# Altium PCB PCB1.PcbDoc
Units mil, origin at the board's own origin, x right, y up, seen from the top; angles counter-clockwise.
Board outline 2000.53 x 2000.53 mil, 2 copper layers (Top Layer, Bottom Layer); 55 components, 53 nets, 232 pads, 74 vias.
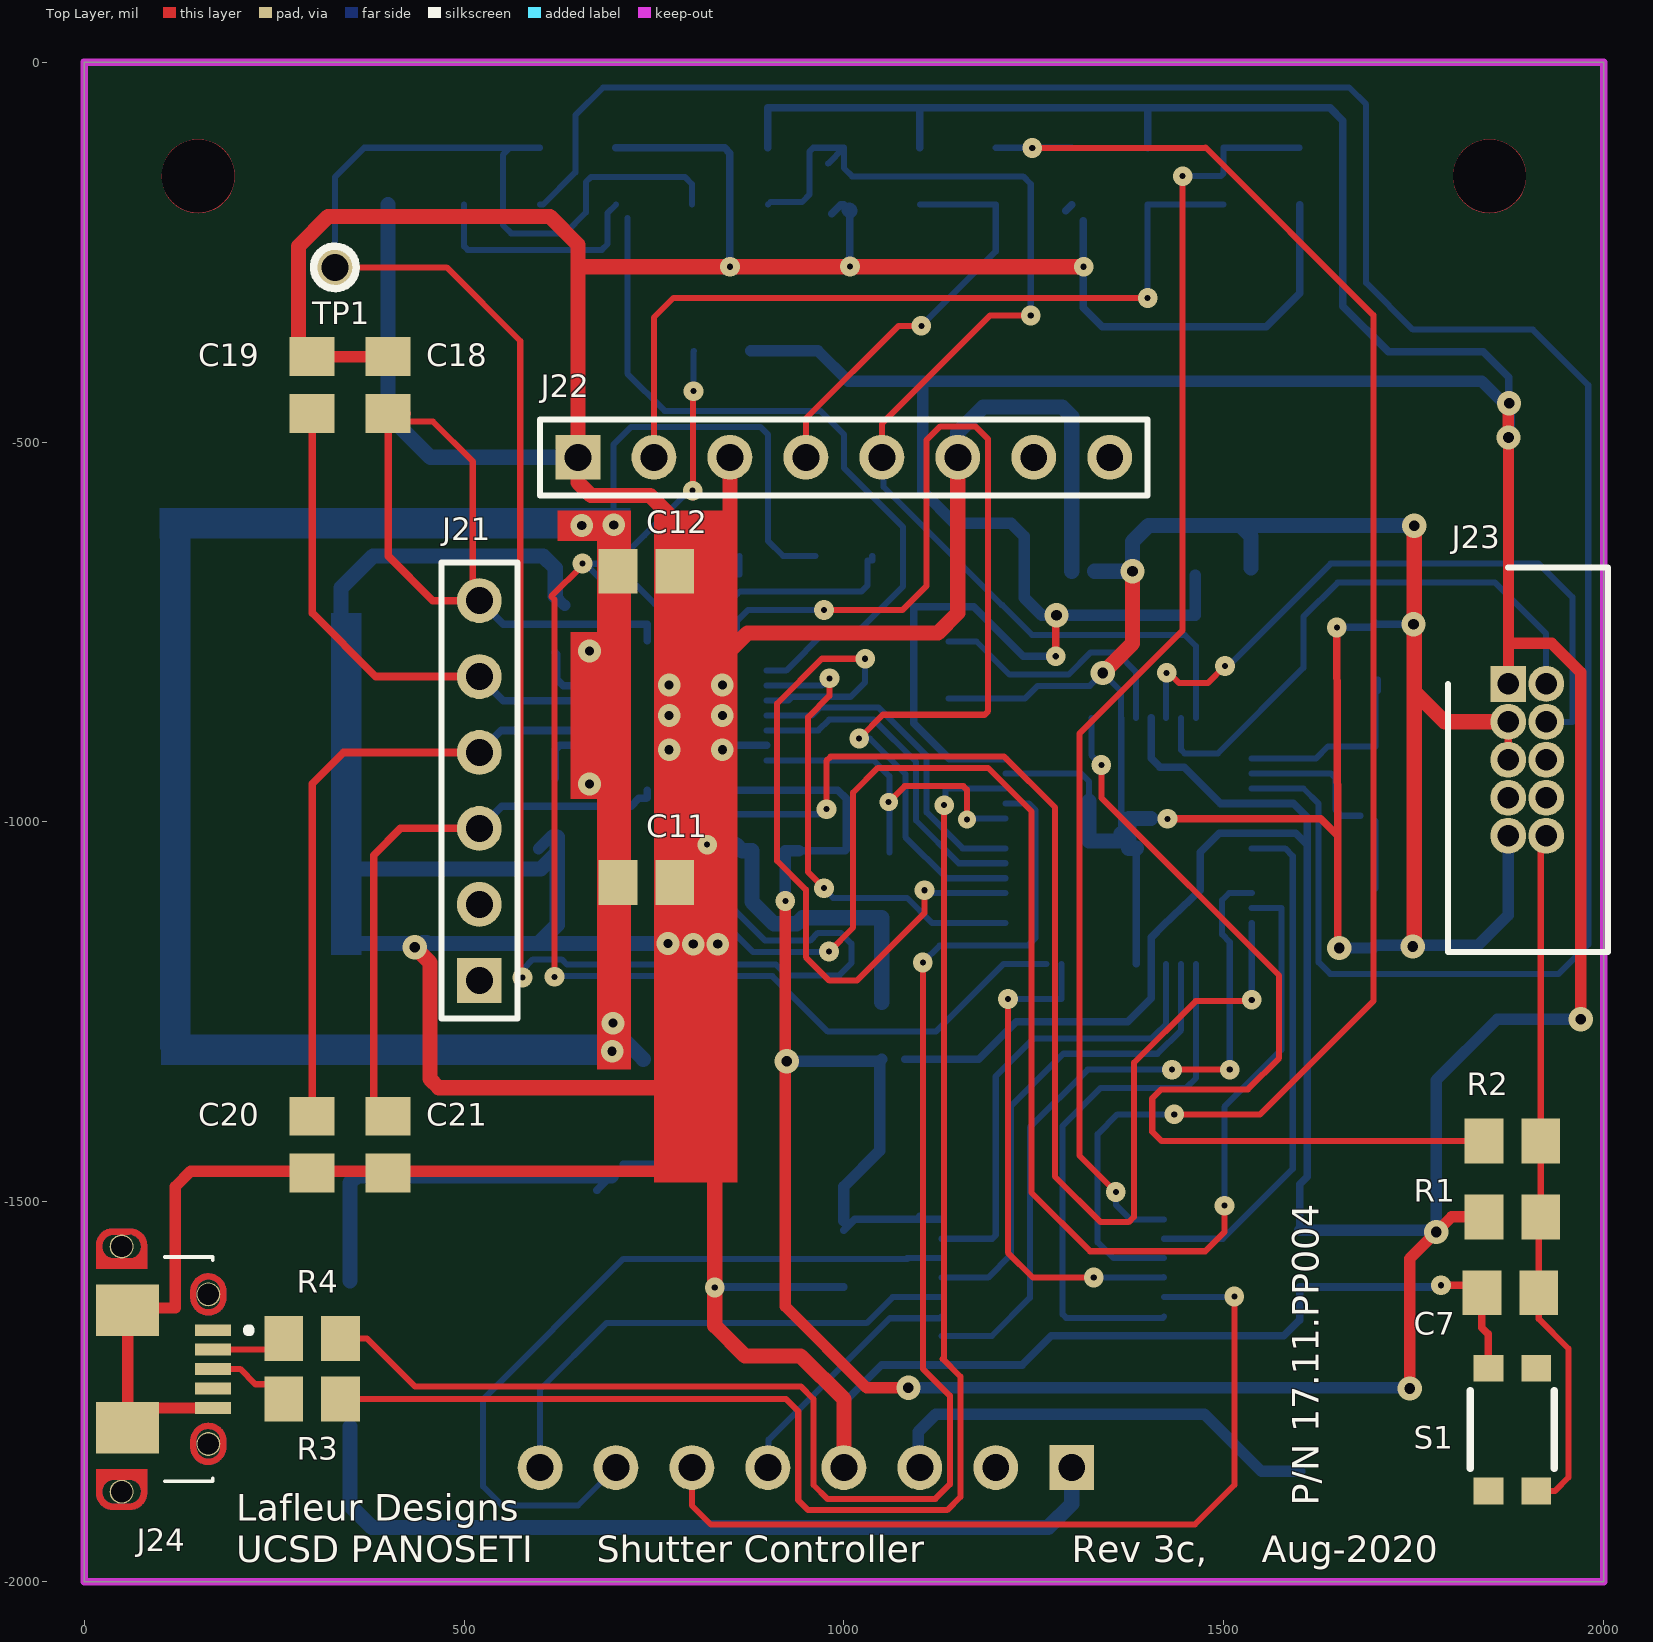
[diagram p0: Top Layer view]
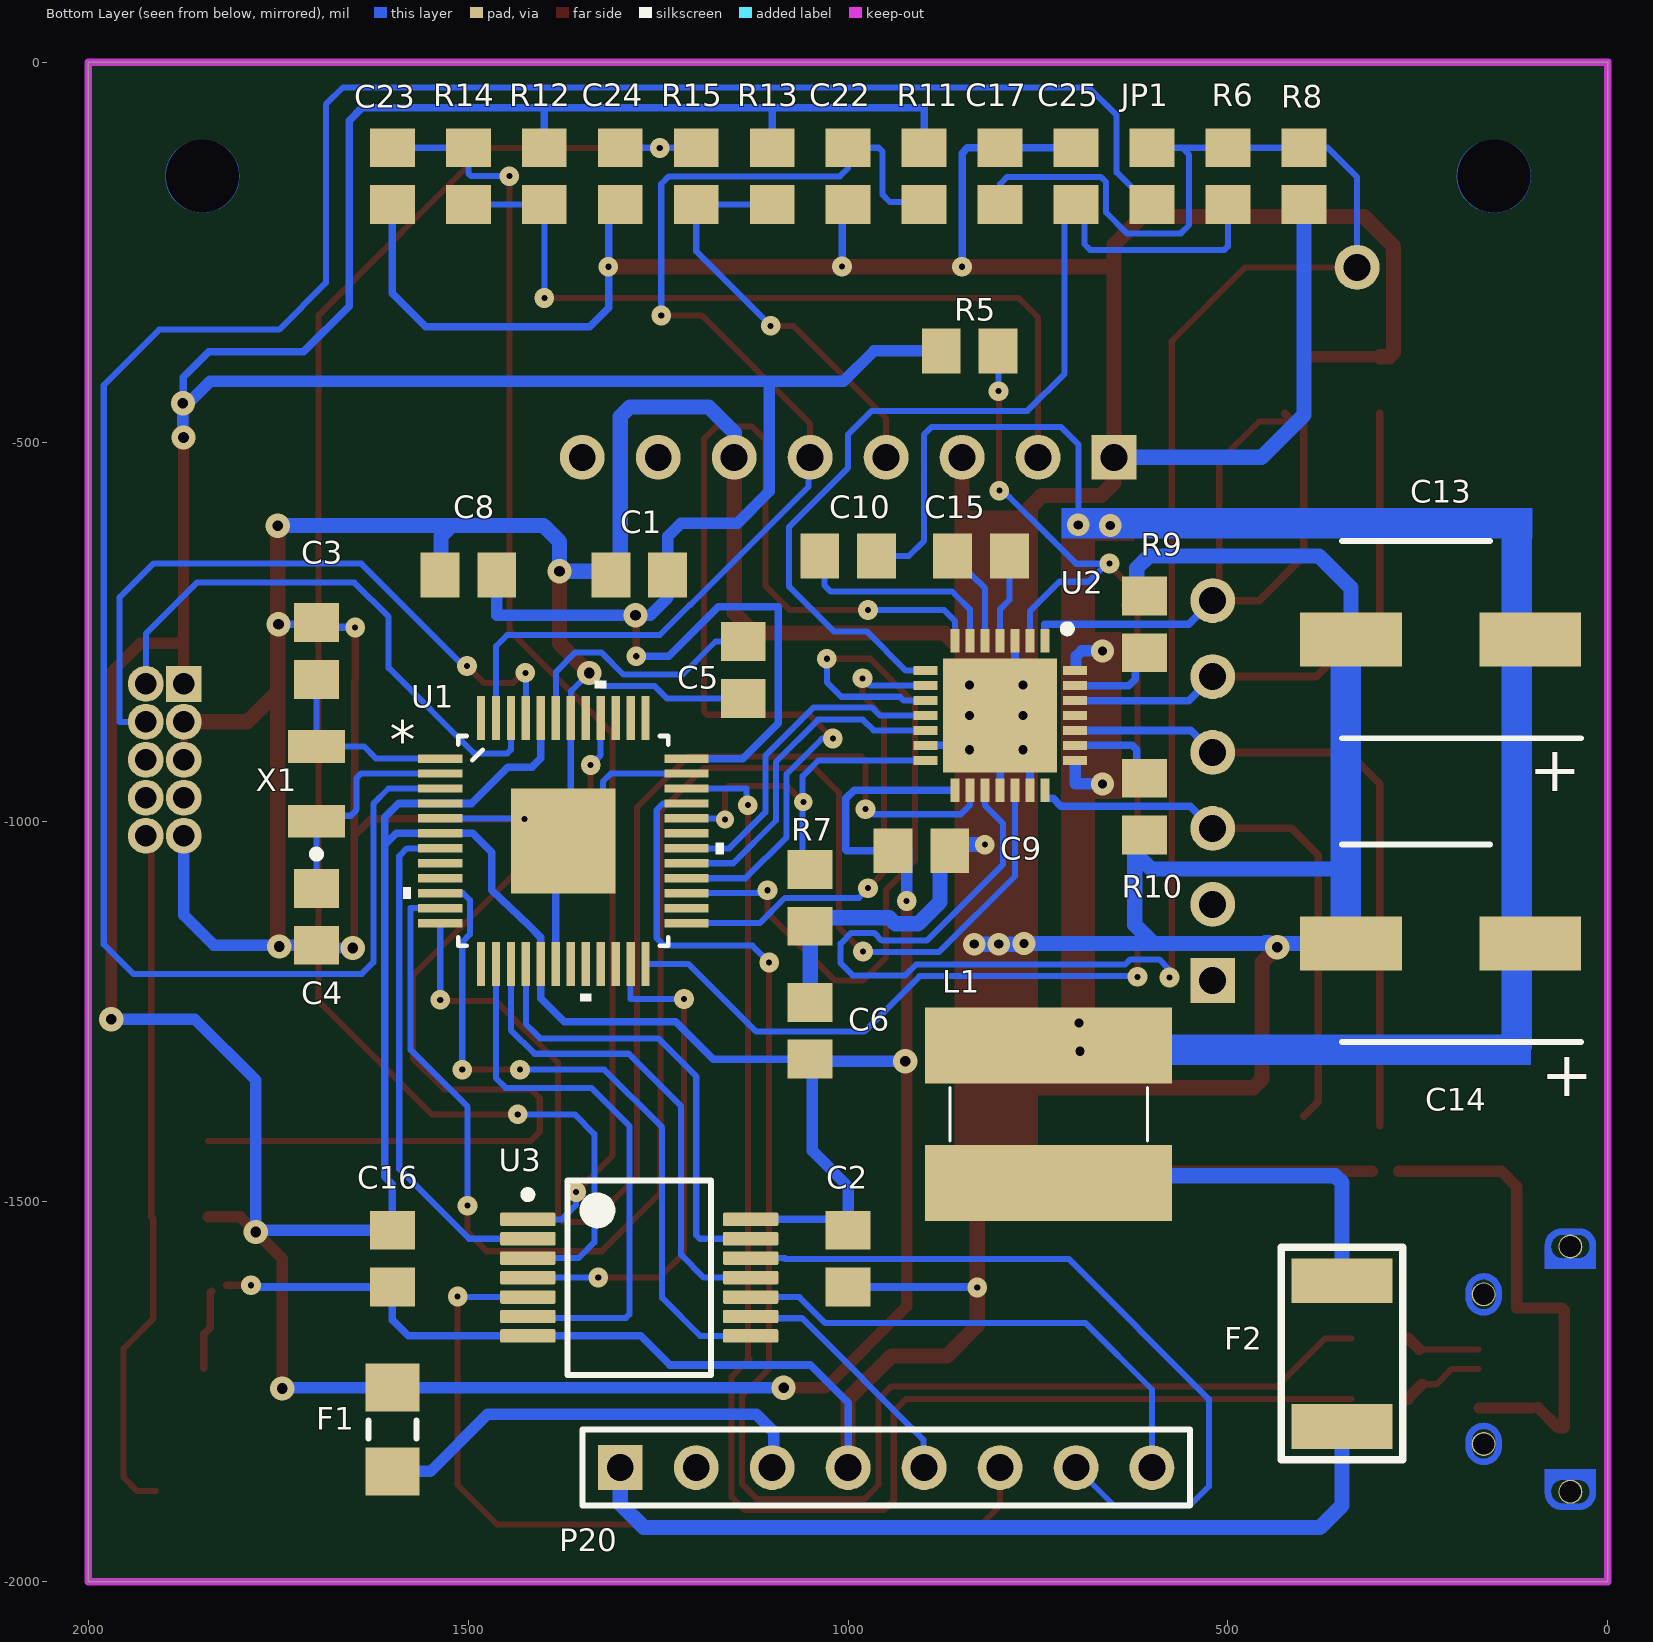
[diagram p1: Bottom Layer view, seen from below]

## Layer stack, top to bottom
Top Solder: solder mask 0.4, Solder Resist, Dk 3.5
Top Layer: signal copper 1.4
Dielectric 1: dielectric 12.6, FR-4, Dk 4.8
Bottom Layer: signal copper 1.4
Bottom Solder: solder mask 0.4, Solder Resist, Dk 3.5

## Board outline
-0.26,-2000 ccw(c0,-2000) 0,-2000.27 2000,-2000.27 ccw(c2000,-2000) 2000.26,-2000 2000.26,0 ccw(c2000,0) 2000,0.27 0,0.27 ccw(c0,0) -0.26,0

## Design rules (kind name [scope] priority, off if disabled: settings)
Clearance [All] p1: gap=6 ignorepadtopadclearanceinfootprint=TRUE except(0: Arc-Hole Track-Hole SMDPad-Hole THPad-Hole Via-Hole Fill-Hole Poly-Hole Region-Hole Text-Hole)
ComponentClearance [All] p1: gap=2 collisioncheckmode=3 verticalgap=2 showdistances=TRUE
HoleSize [All] p1: absolutevalues=TRUE maxlimit=100 minlimit=6 maxpercent=80.000 minpercent=20.000
HoleToHoleClearance [All] p1: gap=6 allowstackedmicrovias=TRUE
MinimumAnnularRing [All] p1: minimumring=6
MinimumSolderMaskSliver [All] p1: minsoldermaskwidth=6
PolygonConnect [All] p1: connectstyle=Relief reliefconductorwidth=10 reliefentries=4 polygonreliefangle="90 Angle" airgapwidth=10
RoutingPriority RoutingPriority_2 [All] p1: routingpriority=3
RoutingPriority RoutingPriority_1 [InNet('GND')] p2: routingpriority=3
RoutingPriority [InNet('+3.3V')] p3: routingpriority=2
RoutingVias [All] p1: holewidth=10 width=22 viastyle="Through Hole" minholewidth=10 minwidth=22 maxholewidth=28 maxwidth=50
SilkToSilkClearance [All] p1: silktosilkclearance=2
SilkToSolderMaskClearance [IsPad] p1: minsilkscreentomaskgap=6 clearancetoexposedcopper=TRUE
SolderMaskExpansion [All] p1: expansion=4
Width GND [InNet('GND')] p1: maxlimit=100 minlimit=6 preferedwidth=20
Width +3.3v [InNet('+3.3V')] p2: maxlimit=20 minlimit=8 preferedwidth=15
Width C10-2(24V) [InNet('NetC10_2')] p3: maxlimit=100 minlimit=8 preferedwidth=20
Width Routing [All] p4: maxlimit=30 minlimit=8 preferedwidth=8
23 further rules are at their usual default settings.

## Classes and differential pairs
component class Sheet2: C9 C10 C11 C12 C13 C14 C15 C16 C17 C18 C19 C20 C21 C22 C23 C24 C25 F2 J21 J22 JP1 L1 P20 R5 R6 R7 R8 R9 R10 R11 R12 R13 R14 R15 TP1 U2 U3
component class Sheet1: C1 C2 C3 C4 C5 C6 C7 C8 F1 J23 J24 R1 R2 R3 R4 S1 U1 X1

## Components (designator, comment, footprint, x,y, rotation, side; value= is the part's Value field where it differs from the comment)
C1 "10uf" 6-0805 1275,-675 r0 bottom
C2 ".1uf" 6-0805 1000,-1575 r270 bottom
C3 "12PF" 6-0805 1700,-775 r90 bottom locked
C4 "12PF" 6-0805 1700,-1125 r270 bottom locked
C5 "1uf" 6-0805 1138,-800 r270 bottom
C6 ".1uf" 6-0805 1050,-1275 r90 bottom
C7 "1uf" 6-0805 1877.4,-1620 r180 top
C8 ".1uf" 6-0805 1500,-675 r0 bottom
C9 ".1uf" 6-0805 903.6,-1038 r180 bottom
C10 ".1uf" 6-0805 1000,-650 r180 bottom
C11 ".1uf" 6-0805 740,-1080 r0 top
C12 ".1uf" 6-0805 740,-670 r0 top locked
C13 "100uf/35v" CAPAE660X610N 220,-760 r0 bottom locked
C14 "100uf/35v" CAPAE660X610N 220,-1160 r0 bottom locked
C15 ".022uf" 6-0805 825,-650 r0 bottom
C16 ".1uf" 6-0805 1600,-1575 r90 bottom
C17 "1uf" 6-0805 800,-150 r90 bottom
C18 "470pf" 6-0805 400,-425 r90 top
C19 "470pf" 6-0805 300,-425 r90 top
C20 "470pf" 6-0805 300,-1425 r270 top
C21 "470pf" 6-0805 400,-1425 r270 top
C22 ".1uf" 6-0805 1000,-150 r90 bottom
C23 ".1uf" 6-0805 1600,-150 r90 bottom
C24 ".1uf" 6-0805 1300,-150 r90 bottom
C25 "4.7uf" 6-0805 700,-150 r90 bottom
F1 "Poly Fuse 250ma" 8-1206 1600,-1800 r270 bottom
F2 "Poly Fuse 750ma" "PTC 2016L" 350,-1700 r90 bottom locked
J21 "Molex 705530110" HDR1X6 520.08,-1208.66 r90 top locked
J22 "Molex 705530112" HDR1X8 650,-520.08 r0 top locked
J23 "3220-10-0100-00" SHDR10W41P127_2X5_1265X510X565P 1874.61,-818.31 r270 top locked
J24 "DX4R205JJAR1800" *JAE_DX4R205JJAR1800_DX4R205JJAR1800(Primary) 0,-1720.47 r270 top locked
JP1 "NU" 6-0805 600,-150 r270 bottom
L1 "MSS7341S" MSS7341502NLD 736,-1385 r0 bottom locked value=Value
P20 "Molex 9014-71108" HDR1X8 1300,-1850 r180 bottom locked
R1 "10k" 6-0805 1880,-1520 r0 top
R2 "330" 6-0805 1880,-1420 r0 top
R3 "22" 6-0805 300,-1760 r0 top
R4 "22" 6-0805 300,-1680 r0 top
R5 "10k" 6-0805 840,-380 r180 bottom
R6 "10k 1%" 6-0805 500,-150 r90 bottom
R7 "NU" 6-0805 1050,-1100 r270 bottom
R8 "10k 1%" 6-0805 400,-150 r270 bottom
R9 "0.56r 0805" 6-0805 610,-740 r90 bottom locked
R10 "0.56r 0805" 6-0805 610,-980 r270 bottom locked
R11 "10k" 6-0805 900,-150 r270 bottom
R12 "10k" 6-0805 1400,-150 r270 bottom
R13 "10k" 6-0805 1100,-150 r270 bottom
R14 "10k" 6-0805 1500,-150 r90 bottom
R15 "10k" 6-0805 1200,-150 r90 bottom
S1 "Reset" KMR_2 1880,-1800 r90 top
TP1 "TestPoint" "Test Point-Thru-Hole" 330,-270 r0 top
U1 "ATSAMD21G18A-AU" TQFP48_7x7MC 1375,-1025 r180 bottom locked value=Value
U2 "Part Number: TMC2209-LA-T" QFN50P500X500X90-29N 800,-860 r270 bottom locked value=Value
U3 "SN74LVC14ADBR" DB0014A_M 1275,-1600 r180 bottom locked
X1 "ABS07-32.768KHz-T" ABRA-ABS07-2_V 1700,-950 r90 bottom locked

## Footprints (in the part's own frame and the unit in brackets; to place one, negate y for a bottom-side part, rotate by r counter-clockwise, add the part's x,y. Pads: shape width x height; smd on the part's side, far side on the other; paste and mask are expansions set on the pad)
6-0805 [mm]
  rect 1.3x1.5 smd: 1(-0.95,0) 2(0.95,0)
8-1206 [mm] "Chip Resistor; Body 3.1 x 1.6 mm (LxW typ)"
  rect 1.6x1.8 smd: 1(-1.4,0) 2(1.4,0)
  silkscreen extent -0.3,-0.8 0.3,0.8
*JAE_DX4R205JJAR1800_DX4R205JJAR1800(Primary) [mm]
  rect 0.4x1.2 smd: 1(-1.3,4.3) 2(-0.65,4.3) 3(0,4.3) 4(0.65,4.3) 5(1.3,4.3)
  round 0.8 hole 0.711 unplated: None(-4.1,1.25) None(-2.5,4.15) None(2.5,4.15) None(4.1,1.25)
  rect 1.725x2.1 smd: S4(-1.962,1.45) S5(1.962,1.45)
  Top Layer region: 197 vertices and 0 holes, not listed, extent 3.35,0.4 4.7,2.1
  Top Layer region: 200 vertices and 0 holes, not listed, extent -4.7,0.4 -3.35,2.1
  Top Layer region: 260 vertices and 0 holes, not listed, extent -3.2,3.55 -1.8,4.75
  Top Layer region: 263 vertices and 0 holes, not listed, extent 1.8,3.55 3.2,4.75
  Bottom Layer region: 197 vertices and 0 holes, not listed, extent 3.35,0.4 4.7,2.1
  Bottom Layer region: 197 vertices and 0 holes, not listed, extent -4.7,0.4 -3.35,2.1
  Bottom Layer region: 263 vertices and 0 holes, not listed, extent 1.8,3.55 3.2,4.75
  Bottom Layer region: 260 vertices and 0 holes, not listed, extent -3.2,3.55 -1.8,4.75
  silkscreen extent -3.75,2.7 3.75,5.6
ABRA-ABS07-2_V [mm] "Hand Drawn, 2-Leads, Body 3.2x1.5mm, Pitch 2.5mm"
  rect 1.1x1.9 smd: 1(-1.25,0) 2(1.25,0)
  silkscreen extent -2.47,-0.12 -2.23,0.13, body extent -1.6,-0.75 1.6,0.75, height 0.9
CAPAE660X610N [mm]
  rect 3.4x1.8 smd: 1(-3,0) 2(3,0)
  silkscreen extent -4.7,-3.3 3.3,3.3, body extent -3.9,-3.4 3.9,3.4, height 6.1
DB0014A_M [mm] "SOP, 14-Leads, Body 5.6x6.5mm, Pitch 0.65mm, IPC Low Density"
  rrect22% 1.85x0.45 smd: 1(-3.725,1.95) 2(-3.725,1.3) 3(-3.725,0.65) 4(-3.725,0) 5(-3.725,-0.65) 6(-3.725,-1.3) 7(-3.725,-1.95) 8(3.725,-1.95) 9(3.725,-1.3) 10(3.725,-0.65) 11(3.725,0) 12(3.725,0.65) 13(3.725,1.3) 14(3.725,1.95)
  silkscreen extent -3.85,-3.25 2.4,3.25, body extent -3.91,-3.1 3.91,3.1, height 2
HDR1X6 [mm] "Connector; Header; 6 Position"
  rect 1.5x1.5 hole 0.9: 1(0,0)
  round 1.5 hole 0.9: 2(2.54,0) 3(5.08,0) 4(7.62,0) 5(10.16,0) 6(12.7,0)
  silkscreen extent -1.27,-1.27 13.97,1.27
HDR1X8 [mm] "Connector; Header; 8 Position"
  rect 1.5x1.5 hole 0.9: 1(0,0)
  round 1.5 hole 0.9: 2(2.54,0) 3(5.08,0) 4(7.62,0) 5(10.16,0) 6(12.7,0) 7(15.24,0) 8(17.78,0)
  silkscreen extent -1.27,-1.27 19.05,1.27
KMR_2 [mm]
  rect 0.9x1 smd: 1(-2.05,-0.8) 2(-2.05,0.8) 3(2.05,-0.8) 4(2.05,0.8)
  silkscreen extent -1.3,-1.4 1.3,1.4
MSS7341502NLD [mil]
  rect 325x100 smd: 1(0,90.55) 2(0,-90.55)
  silkscreen extent -130,-35 130,35
"PTC 2016L" [mil]
  rect 59x133 smd: 1(-96,0) 2(96,0)
  silkscreen extent -140,-80 140,80
QFN50P500X500X90-29N [mm]
  rect 0.8x0.3 smd: 1(-2.5,1.5) 2(-2.5,1) 3(-2.5,0.5) 4(-2.5,0) 5(-2.5,-0.5) 6(-2.5,-1) 7(-2.5,-1.5) 15(2.5,-1.5) 16(2.5,-1) 17(2.5,-0.5) 18(2.5,0) 19(2.5,0.5) 20(2.5,1) 21(2.5,1.5)
  rect 0.3x0.8 smd: 8(-1.5,-2.5) 9(-1,-2.5) 10(-0.5,-2.5) 11(0,-2.5) 12(0.5,-2.5) 13(1,-2.5) 14(1.5,-2.5) 22(1.5,2.5) 23(1,2.5) 24(0.5,2.5) 25(0,2.5) 26(-0.5,2.5) 27(-1,2.5) 28(-1.5,2.5)
  rect 3.8x3.8 smd: 29(0,0)
  silkscreen extent -3.02,2.12 -2.78,2.37, body extent -2.55,-2.55 2.55,2.55, height 0.9
SHDR10W41P127_2X5_1265X510X565P [mm]
  rect 1.2x1.2 hole 0.711: 1(0,0)
  round 1.2 hole 0.711: 2(0,1.27) 3(1.27,0) 4(1.27,1.27) 5(2.54,0) 6(2.54,1.27) 7(3.81,0) 8(3.81,1.27) 9(5.08,0) 10(5.08,1.27)
  silkscreen extent -3.89,-2.01 8.97,3.34
"Test Point-Thru-Hole" [mm]
  round 1.5 hole 0.9: 1(0,0)
  silkscreen extent -0.71,-0.71 0.71,0.71
TQFP48_7x7MC [mil]
  rect 58x11 smd: 1(-162,108.27) 2(-162,88.58) 3(-162,68.9) 4(-162,49.21) 5(-162,29.53) 6(-162,9.84) 7(-162,-9.84) 8(-162,-29.53) 9(-162,-49.21) 10(-162,-68.9) 11(-162,-88.58) 12(-162,-108.27) 25(162,-108.27) 26(162,-88.58) 27(162,-68.9) 28(162,-49.21) 29(162,-29.53) 30(162,-9.84) 31(162,9.84) 32(162,29.53) 33(162,49.21) 34(162,68.9) 35(162,88.58) 36(162,108.27)
  rect 11x58 smd: 13(-108.27,-162) 14(-88.58,-162) 15(-68.9,-162) 16(-49.21,-162) 17(-29.53,-162) 18(-9.84,-162) 19(9.84,-162) 20(29.53,-162) 21(49.21,-162) 22(68.9,-162) 23(88.58,-162) 24(108.27,-162) 37(108.27,162) 38(88.58,162) 39(68.9,162) 40(49.21,162) 41(29.53,162) 42(9.84,162) 43(-9.84,162) 44(-29.53,162) 45(-49.21,162) 46(-68.9,162) 47(-88.58,162) 48(-108.27,162)
  rect 138x138 smd paste-68.5 mask+0: EPAD(0,0)
  silkscreen extent -211,-211 211,211, body extent 0,0 10,10, height 10

## Part data
C1 C2 C3 C4 C5 C6 C7 C8 C9 C10 C11 C12 C15 C16 C17 C18 C19 C20 C21 C22 C23 C24 C25: library part CAP_2, "Capacitor", Fitted=True
C13 C14: library part EEE-FT1V101AP, "Capacitor Polarised", Manufacturer_Name=Panasonic, Mouser Part Number=667-EEE-FT1V101AP, Allied_Number=70258385, Allied Price/Stock=https://www.alliedelec.com/panasonic-eee-ft1v101ap/70258385/, Datasheet Link=https://industrial.panasonic.com/cdbs/www-data/pdf/RDE0000/ABA0000C1240.pdf, Height=6.1mm, Manufacturer_Part_Number=EEE-FT1V101AP, Mouser Price/Stock=https://www.mouser.com/Search/Refine.aspx?Keyword=667-EEE-FT1V101AP
F1 F2: library part "Poly Fuse", "Poly Fuse"
J21: library part "Header 6", "Header, 6-Pin", LatestRevisionDate=17-Jul-2002, LatestRevisionNote="Re-released for DXP Platform.", Publisher="Altium Limited"
J22 P20: library part "Header 8", "Header, 8-Pin", LatestRevisionDate=17-Jul-2002, LatestRevisionNote="Re-released for DXP Platform.", Publisher="Altium Limited"
J23: "Connector", Manufacturer_Name="CNC Tech", Datasheet Link=http://www.cnctech.us/pdfs/3220-XX-0100-00.pdf, Height=5.65mm, Manufacturer_Part_Number=3220-10-0100-00
J24: "DX4 series, receptacle, on-board, right-angle standard mount, surface mount", Package=None, Digi-Key_Part_Number=670-2677-1-ND, Digi-Key_Purchase_URL=https://www.digikey.com/product-detail/en/jae-electronics/DX4R205JJAR1800/670-2677-1-ND/3903237?utm_source=snapeda&utm_medium=aggregator&utm_campaign=symbol, MF="JAE Electronics", MP=DX4R205JJAR1800, SnapEDA_Link=https://www.snapeda.com/parts/DX4R205JJAR1800/JAE%20Electronics/view-part/?ref=snap
JP1 R1 R2 R3 R4 R5 R6 R7 R8 R9 R10 R11 R12 R13 R14 R15: library part ERJ8EN, "Precision Thick Film Chip Resistor, 10 Ohm to 2.2M Ohm Range, 1% Tolerance, 1206 Size, 0.125 W", PackageDocument=Mar-2003, Code_IPC="3216 [1206]", ComponentLink1Description="Manufacturer Link", ComponentLink1URL=http://www.panasonic.com/industrial/components/resistive_products.htm, ComponentLink2Description=Datasheet, ComponentLink2URL=http://www.panasonic.com/industrial/components/pdf/AOA0000CE2.pdf, LatestRevisionDate=19-Mar-2004, LatestRevisionNote="Silkscreen size reduced.", PackageReference=8-1206, Published=17-Dec-2003, Publisher="Altium Limited"
L1: library part SRU1048-101Y, "No Description Available", Built_By=EMA_UL_Team, Copyright="Copyright (C) 2018 Accelerated Designs. All rights reserved", Manufacturer_Part_Number=SRU1048-101Y, Vendor="Bourns Electronics"
S1: library part SW-PB, "Switch", LatestRevisionDate=17-Jul-2002, LatestRevisionNote="Re-released for DXP Platform.", PackageReference=SPST-2, Published=24-Mar-1999, Publisher="Altium Limited"
U1: "No Description Available", Built_By=EMA_Molly, Copyright="Copyright (C) 2018 Accelerated Designs. All rights reserved", Manufacturer_Part_Number=ATSAMD21G18A-AU, RefDes=RefDes, Type=DEV, Vendor=Microchip
U2: library part TMC2209-LA-T, "No Description Available", Copyright="Copyright (C) 2018 Accelerated Designs. All rights reserved", Manufacturer_Part_Number=TMC2209-LA-T, RefDes=RefDes, Type=DEV, Vendor=Trinamic
U3: library part CMP-1615-00327-3, "Hex Schmitt-Trigger Inverter, DB0014A, LARGE T&R", F @ Nom Voltage(Max)(Mhz)=100, Generic Part Number=SN74LVC14A, ICC @ Nom Voltage(Max)(mA)=0.01, Manufacturer="Texas Instruments", Operating Temperature Range(C)="-40 to 125", Rating=Catalog, tpd @ Nom Voltage(Max)(ns)=11,7.8,7.5,6.4, Voltage(Nom)(V)=1.8,2.5,2.7,3.3, Bits(#)=6, Code_JEDEC=MO-150, DatasheetVersion=SCAS285AA, Input Type=CMOS,TTL, Output Drive (IOL/IOH)(Max)(mA)=-24/24, Output Type=CMOS, PackageReference=DB0014A, Schmitt Trigger=Yes, Technology Family=LVC, VCC(Max)(V)=3.6, VCC(Min)(V)=2
X1: library part CMP-0447-00001-2, "Crystal, 32.768 kHz, 12.5 pF, -40 to 85 degC, SMD Low Profile 3.2 x 1.5 x 0.9 mm, Tape and Reel", Equivalent Series Resistance (R1)="70 Kohm", Frequency="32.768 kHz", Frequency Tolerance @+25degC="+/- 20 ppm", Insulation Resistance (Min)="500 Mohm", Load Capacitance (CL)="12.5 pF", Manufacturer=Abracon, Operating Temperature="-40 to 85 degC", Q Value (Type)=30000, Shunt Capacitance (C0)="0.9 to 1.2 pF", ComponentLink1Description="Manufacturer URL", ComponentLink1URL=http://www.abracon.com/, ComponentLink2Description=Datasheet, ComponentLink2URL=http://www.abracon.com/Resonators/ABS07.pdf, ComponentLink3Description="Package Specification", ComponentLink3URL=http://www.abracon.com/Resonators/ABS07.pdf, DatasheetVersion=04.03.13, Drive Level (Type)="0.1 uW", Mounting Technology="Surface Mount", Operation Mode="Flexural Mode (Tuning Fork)", PackageDescription="2-Pin Hand Drawn, Body 3.2x1.5mm, Pitch 2.5mm", PackageReference=ABS07-2, Packing="Tape and Reel", PartNumber=ABS07-32.768KHz-T

## Free pads (board coordinates)
  round 60 hole 96.06 unplated: 5(150,-150) 5(1850,-150)

## Via types
v1: diameter 26, hole 8, Top Layer to Bottom Layer, 42 vias
v2: diameter 30, hole 12, Top Layer to Bottom Layer, 15 vias
v3: diameter 32, hole 14, Top Layer to Bottom Layer, 15 vias
v4: diameter 24, hole 8, Top Layer to Bottom Layer, 2 vias

## Nets (pads, with @x,y where several pads share a name; then routed paths per layer and width w, separated by ;. In a path a pad name is that pad's centre, name@x,y a point inside that pad or via, vN(x,y) a via of type N, cw(c..) or ccw(c..) an arc to the next point about the centre after c; other vN are vias at no path point)
+3.3V: C1.1 C2.1 C6.1 C8.1 C9.1 C16.2 F1.1 J23.1 R1.1 R5.1 R11.1 R12.1 R13.1 U1.4 U1.6 U1.17 U1.36 U1.44 U2.15 U3.14 | length 9414.3
  Top Layer w10: v1(1279,-782) v3@1279,-729
  Top Layer w15: v1(923,-1104.25) 923,-1638 1030,-1745 v3(1085,-1745) ; v3@1279,-729 v3(1280,-728) ; v3(1745,-1746) 1745,-1575 v3(1780,-1540) 1800,-1520 R1.1 ; J23.1 1875,-817.91 v3(1875,-494) 1874.61,-493.61 1874.61,-450.25 v3(1875.75,-449.1) ; 1877,-765 1931.75,-765 1970,-803.25 v3(1970,-1260)
  Bottom Layer w10: U2.15@859.06,-958.25 992,-958.25 1003,-969.25 1003,-1036.5 1001.5,-1038 C9.1 ; R11.1 900,-60 1100,-60 ; C2.1 1014.37,-1523.23 U3.14@1103.86,-1523.23 ; 1080.5,-1312.4 1177.85,-1312.4 1227.25,-1263 1373.78,-1263 1404.53,-1232.25 U1.17 1404.53,-1152.25 1420.53,-1136.25 1469,-1090.25 1469,-1040.25 1494.09,-1015.16 U1.6 1595.16,-1015.16 1610,-1030 ; U3.14@1100,-1519.37 U3.14@1103.86,-1523.23 ; R13.1 1100,-60 ; U3.14 U3.14@1103.86,-1523.23 ; U1.36 1138.73,-916.73 1092,-870 1092,-717 1171,-717 1236,-782 v1(1279,-782) ; R12.1 1400,-61 ; U1.44 1404.53,-916.53 1416.25,-928.25 1448.25,-928.25 1495.79,-975.79 U1.4 1591.79,-975.79 1610,-994 1610,-1030 ; C16.2 1600,-1477.25 1610,-1467.25 1610,-1030 ; v3@1874.61,-450.25 1875.51,-449.35 1875.51,-414.51 1842,-381 1717,-381 1657,-321 1657,-77 1640,-60 1100,-60
  Bottom Layer w15: R5.1 966,-380 1006,-420 1104,-420 ; v1@923,-1100 923,-1038 C9.1 ; v3@935.6,-1315 C6.1@1047.4,-1315 ; C2.1@1000,-1525 1000,-1480 1047,-1433 1047,-1315.4 C6.1@1047.4,-1315 ; C6.1 C6.1@1047.4,-1315 ; v3(1085,-1745) 1090,-1745 1090.12,-1744.88 F1.1 v3@1745,-1744.88 ; v3@1276.5,-731.5 v3(1280,-728) ; C8.1 1462.6,-728 v3(1280,-728) ; C16.2 v3@1780,-1537.6 ; v3(1780,-1540) v3@1780,-1537.6 ; v3@1874.61,-450.25 1870,-450.25 1839.75,-420 1104,-420 ; v3(1875,-494) 1875.75,-493.25 v3(1875.75,-449.1) ; v3(1970,-1260) 1860,-1260 1780,-1340 v3@1780,-1537.6 ; 1104,-420 1104,-565 1145.85,-606.85 1220.2,-606.85 1237.6,-624.25 C1.1 1237.6,-705.05 1260.55,-728 v3(1280,-728)
  other v3: 925,-1315
GND: C1.2 C2.2 C3.2 C4.2 C5.2 C6.2 C7.2 C8.2 C9.2 C11.2 C12.2 C13.2 C14.2 C16.1 C17.2 C18.2 C19.2 C20.2 C21.2 C22.1 C23.1 C24.1 C25.2 J22.1 J22.3 J22.6 J23.3 J23.5 J23.9 J24.5 J24.S4 J24.S5 P20.4 R7.2 R8.2 R9.2 R10.2 S1.4 U1.5 U1.18 U1.35 U1.42 U1.EPAD U2.3 U2.13 U2.18 U2.20 U2.29 U3.7 | length 15056.1
  Top Layer w8: v3@1650,-1164 v3(1652,-1166)
  Top Layer w10: v1(1426,-996) 1628,-996 1650,-1018 ; v1(1649,-744) 1650,-1018 ; v3@1650,-1164 1650,-1018 ; v1(1786,-1610) C7.2@1818.25,-1610 ; C7.2@1838,-1618 C7.2 1840,-1665.75 1848.5,-1674.25 S1.4 ; J23.5 J23.3
  Top Layer w15: J24.S4 57.09,-1796.8 57.8,-1797.51 65.18,-1797.51 J24.S5@91.63,-1771.06 ; J24.S4@57.8,-1642.99 60.78,-1640 120,-1640 120,-1480 140,-1460 C20.2@275,-1460 ; 99.61,-1771.65 J24.5 ; C19.2 C18.2 ; C20.2@310,-1460 750,-1460
  Top Layer w20: C19.2 287.6,-387.6 282,-382 282,-242.25 321,-203.25 613,-203.25 650,-240.25 650,-269.25 ; v3(435,-1165) 455,-1185 455,-1338.28 466.72,-1350 760,-1350 770,-1340 ; 770,-1424.25 770,-1340 ; v2(770,-860) v2(770,-905) 770,-1340 ; v2(770,-820) 770,-595.25 745,-570.25 667,-570.25 650,-553.25 J22.1 650,-269.25 ; v2(840,-860) v2(840,-905) 830,-915 v1(830,-1613.11) 830,-1663.25 869.75,-1703 943,-1703 1000,-1760 P20.4 ; v2(840,-820) 840,-784.25 873,-751.25 1123.75,-751.25 1150,-725 J22.6 ; 850,-600 850,-530 J22.3 ; v1(1315.75,-269.25) v1(850,-269.25) 650,-269.25 ; v3(1341,-804) 1380,-765 v3(1380,-670) ; v3(1749,-1164) 1751,-1162 1751,-828.31 ; v3(1751,-610) 1751,-828.31 ; J23.3 1791,-868.31 1752,-829.31 1751,-828.31
  Bottom Layer w8: v1@830,-1616.21 v1(830,-1613.11) ; C5.2 1238.6,-837.4 1255,-821 1324,-821 v3(1341,-804) 1364.84,-827.84 1364.84,-862.69 U1.42 U1.EPAD@1365.16,-1015.16 ; U1.35 1312.42,-936.42 1322.86,-946.86 U1.EPAD@1322.86,-972.86 ; U1.EPAD@1404.53,-995.47 U1.5 ; C3.2@1693.6,-744 C3.2 C3.2@1702.4,-740
  Bottom Layer w10: C25.2 C17.2 843,-112.6 850,-119.6 v1(850,-269.25) ; U2.20 760.63,-899.37 U2.29 ; U2.3 780.32,-840.31 U2.29 ; U2.18 U2.29 ; v2(840,-905) 845.63,-899.37 U2.13 ; v1@841.39,-1612.4 C2.2 ; C22.1@984,-199.46 996.06,-187.4 C22.1 C22.1@1007,-194.4 ; P20.4 1000,-1765 1050,-1715 1235,-1715 1273.23,-1676.77 U3.7 1579,-1676.77 1600,-1655.77 C16.1 1786,-1612.4 v1(1786,-1610) ; v1(1008,-269) C22.1@1008,-195.4 ; C24.1@1292,-195.4 C24.1 ; C24.1@1315,-209 1315,-323 1340.25,-348.25 1556,-348.25 1600,-304.25 C23.1 ; U1.18 U1.EPAD@1384.84,-1034.84 ; v1(1649,-744) C3.2@1693.6,-744 ; C3.2@1702.4,-740 v3(1750,-740)
  Bottom Layer w15: R10.2@597.97,-1035.49 616.06,-1017.4 620,-1017.4 R10.2@622.6,-1020 ; R9.2@620,-702.6 R9.2@632.4,-715 ; v3(1652,-1166) 1696.4,-1166 C4.2 1835,-1162.4 1874.61,-1122.8 J23.9
  Bottom Layer w20: C14.2 766.74,-1160 v2(768.4,-1160) 769.4,-1161 v2(801.7,-1161) v2(834,-1161) ; C13.2 338.11,-691.89 380,-650 604.14,-650 620,-665.86 R9.2@620,-702.6 ; 350,-1057.25 355,-1062.25 601,-1062.25 R10.2@622.6,-1040.65 ; R8.2 400,-464.25 455.83,-520.08 J22.1 ; 451,-1159 446,-1159 444.75,-1160.25 597.77,-1160.25 598.02,-1160 598.22,-1160 622.6,-1135.62 R10.2@622.6,-1040.65 ; R10.2@622.6,-1020 R10.2@622.6,-1040.65 ; v1(820,-1030) 858.2,-1030 C9.2 879,-1038 879,-1105.25 908,-1134.25 937.7,-1134.25 945.7,-1126.25 1050,-1126.25 R7.2 C6.2 ; C22.1@1007,-194.4 C22.1@1008,-195.4 ; J22.6 1150,-487.55 1183.55,-454 1287.51,-454 1300,-466.49 C1.2@1300,-670 ; U1.EPAD@1322.86,-972.86 1322.86,-1025 U1.EPAD ; C1.2@1330,-670 v3(1380,-670) 1380,-631 1401,-610 1522,-610 ; U1.EPAD@1365.16,-1015.16 U1.EPAD@1375,-1015.16 ; U1.EPAD@1384.84,-1034.84 1375,-1034.84 U1.EPAD ; U1.EPAD@1404.53,-995.47 1375,-995.47 U1.EPAD@1375,-1015.16 ; C8.2@1536,-666 1536,-624 1522,-610 ; v3(1751,-610) 1522,-610 ; U1.EPAD U1.EPAD@1375,-1015.16
NetC3_1: C3.1 U1.1 X1.2 | length 264
  Bottom Layer w8: U1.1 1621.27,-916.73 1637.21,-900.79 X1.2 1700,-827.4 1703,-827.4 1703,-812.4 C3.1
NetC4_1: C4.1 U1.2 X1.1 | length 279
  Bottom Layer w8: U1.2 1617.42,-936.42 1641.42,-936.42 1647,-942 1647,-984 1655,-992 X1.1@1680,-992 ; C4.1 X1.1
NetC5_1: C5.1 U1.43 | length 347.7
  Bottom Layer w8: C5.1 1174.6,-762.6 1218,-806 1296,-806 1325,-777 1359,-777 1384.84,-802.84 U1.43
NetC7_1: C7.1 J23.10 R1.2 R2.2 S1.1 | length 919.1
  Top Layer w8: S1.1 1936.29,-1880.71 1954,-1863 1954,-1693.45 1914.8,-1654.25 1914.8,-1522.35 R1.2 R2.2 1917.4,-1018.31 J23.10
NetC10_1: C10.1 U2.6 | length 290.9
  Bottom Layer w8: U2.6 839.37,-720.63 860,-700 863,-697 1023,-697 1031.33,-688.67 1031.33,-656.07 1037.4,-656.07 C10.1
NetC10_2: C10.2 C11.1 C12.1 C13.1 C14.1 L1.2 U2.22 U2.28 | length 764.7
  Top Layer w15: v2(665,-775) 695,-775
  Bottom Layer w8: v2@698.47,-610.47 v2(697,-609) 697,-503 720,-480 890,-480 900,-490 900,-630 920,-650 C10.2
  Bottom Layer w15: v2(665,-950) 700.79,-950 700.79,-925 ; v2@667.87,-777.87 v2(665,-775) 692.79,-775 700,-782.21 700,-795
  Bottom Layer w20: v2(695,-1302) 695,-1278.66 700,-1273.66 706.78,-1283.22 L1.2@736,-1312.45
  other v2: 696,-1265 655,-610
NetC15_1: C15.1 U2.4 | length 116.7
  Bottom Layer w8: C15.1 787.6,-707.6 800,-720 U2.4
NetC15_2: C15.2 U2.5 | length 143.6
  Bottom Layer w8: U2.5 819.69,-692.72 837.87,-674.53 862.4,-674.53 C15.2
NetC17_1: C17.1 JP1.1 R6.2 R8.1 TP1.1 U2.17 | length 2859.9
  Top Layer w8: TP1.1 477,-270 574,-367 574,-1210.15 v1@577,-1213.15 ; v1@577,-1213.15 v1(577,-1204.82) v1@577,-1213.15
  Bottom Layer w8: TP1.1 330,-151.25 368.65,-112.6 R8.1 R6.2 560.47,-112.6 ; v1(577,-1204.82) 577,-1194.64 590.64,-1181 628.53,-1181 635.33,-1187.8 910.35,-1187.8 924.55,-1202 994,-1202 1010,-1186 1010,-1160.25 996,-1146.25 965.7,-1146.25 955.7,-1156.25 896.25,-1156.25 796,-1056 796,-1002.25 819.69,-978.56 U2.17 ; JP1.1 560.47,-112.6 ; C17.1 800,-160.25 791,-151.25 666.89,-151.25 660.47,-157.67 660.47,-197.78 633,-225.25 562,-225.25 551,-214.25 551,-122.06 560.47,-112.6
NetC18_1: C18.1 J21.6 U2.1 | length 911.6
  Top Layer w8: C18.1@400,-475 C18.1 ; C18.1@414.47,-472.93 459,-472.93 511.42,-525.35 J21.6@511.42,-700
  Top Layer w10: C18.1@400,-475 400,-650 458.66,-708.66 J21.6 J21.6@511.42,-700 ; C18.1@414.47,-472.93 C18.1@425,-462.4
  Bottom Layer w10: J21.6@522.73,-706.01 J21.6 551.42,-740 740.94,-740 U2.1
NetC19_1: C19.1 J21.5 U2.26 | length 711.9
  Top Layer w10: C19.1 300,-725 383.66,-808.66 J21.5
  Bottom Layer w10: J21.5 551.73,-840.31 U2.26
NetC20_1: C20.1 J21.4 U2.24 | length 880.7
  Top Layer w10: C20.1@300,-1400 C20.1 300,-950 341.34,-908.66 J21.4
  Bottom Layer w10: J21.4 549.06,-879.68 U2.24
NetC21_1: C21.1 J21.3 U2.21 | length 752.6
  Top Layer w10: C21.1 381,-1368.6 381,-1044 416.34,-1008.66 J21.3
  Bottom Layer w10: J21.3 549.55,-979.19 720.18,-979.19 730.2,-969.17 740.04,-969.17 740.94,-968.27 U2.21
NetC22_2: C22.2 J22.5 R11.2 U1.47 | length 1579.5
  Top Layer w8: J22.5 1050,-476 1192.75,-333.25 v1(1246,-333.25)
  Bottom Layer w8: R11.2 903.4,-184 945,-184 955,-174 955,-117.28 959.69,-112.6 C22.2 ; C22.2@979.25,-133.34 C22.2 ; J22.5 1052.15,-522.23 1052.15,-558.81 1207.87,-714.53 1208.53,-714.53 1248,-754 1449,-754 1463.58,-768.58 U1.47 ; v1(1246,-333.25) 1246,-160.25 1236,-150.25 1011,-150.25 1000,-139.25 C22.2
NetC23_2: C23.2 R14.2 U3.1 | length 1691.2
  Top Layer w8: v1(1358,-1487.25) 1310,-1439.25 1310,-884 1446,-748 v1(1446,-150)
  Bottom Layer w8: v1(1358,-1487.25) 1358,-1504.25 1376.98,-1523.23 U3.1 ; v1(1446,-150) 1496.25,-150 1500,-146.25 R14.2 C23.2
NetC24_2: C24.2 R15.2 U3.3 | length 2226.5
  Top Layer w8: v1(1248,-113) 1475.5,-113 1476.25,-112.25 1697,-333 1697,-1236 1548,-1385 v1(1435,-1385)
  Bottom Layer w8: R15.2 v1@1256.35,-112.6 ; v1(1248,-113) 1255.95,-113 v1@1256.35,-112.6 ; C24.2 v1@1256.35,-112.6 ; U3.3 1355,-1574.41 1334,-1553.41 1334,-1411 1360,-1385 v1(1435,-1385)
NetC25_1: C25.1 R6.1 U2.8 | length 1286.4
  Bottom Layer w8: R6.1 500,-242.31 504.69,-247 681.25,-247 689,-239.25 689,-198.4 C25.1 ; C25.1@715,-205 715,-410 764,-459 969,-459 1000,-490 1000,-534 1078,-612 1078,-690 1018.75,-749.25 975.6,-749.25 923.9,-800.94 U2.8
NetF1_2: F1.2 P20.3 | length 580.6
  Bottom Layer w15: P20.3@1098,-1841 1098,-1803 1121,-1780 1474.75,-1780 1549.87,-1855.12 F1.2
NetF2_1: F2.1 P20.1 | length 1126.9
  Bottom Layer w20: F2.1 350,-1900 379,-1929 1269,-1929 1300,-1898 P20.1
NetF2_2: F2.2 L1.1 | length 554.1
  Bottom Layer w10: L1.1@675,-1485 L1.1@694,-1466 ; L1.1@709.45,-1450.55 L1.1@760,-1450.55
  Bottom Layer w20: F2.2 350,-1475 359,-1466 L1.1@694,-1466
NetJ22_2: J22.2 R12.2 R14.1 | length 1067.6
  Top Layer w8: J22.2 750,-336 775.75,-310.25 v1(1400,-310.25)
  Bottom Layer w8: v1(1400,-310.25) R12.2 R14.1
NetJ22_4: J22.4 R13.2 R15.1 | length 553.8
  Top Layer w8: J22.4 950,-469 1072,-347 v1(1102,-347)
  Bottom Layer w8: R13.2 R15.1 1200,-249 v1(1102,-347)
NetJ23_2: J23.2 U1.46 | length 751.5
  Bottom Layer w8: U1.46 1443.9,-905.31 1448.58,-910 1492.25,-910 1605,-797.25 1605,-730 1650,-685 1857.36,-685 1924.61,-752.25 J23.2
NetJ23_4: J23.4 U1.45 | length 886.8
  Top Layer w8: v1(1425,-803.79) 1427.9,-803.79 1441.11,-817 1479.5,-817 v1(1501.75,-794.75)
  Bottom Layer w8: U1.45 1424.21,-814.58 1430,-808.79 v1(1425,-803.79) ; v1(1501.75,-794.75) 1504,-797 1641,-660 1914.75,-660 1959,-704.25 1959,-868.31 J23.4
NetJ24_2: J24.2 R4.1 | length 98.7
  Top Layer w8: J24.2@170,-1694.66 R4.1@247.94,-1694.66
  Top Layer w15: R4.1@247.94,-1694.66 R4.1
NetJ24_3: J24.3 R3.1 | length 110
  Top Layer w8: J24.3@170,-1720.25 205.25,-1720.25 225.33,-1740.33 R3.1@244.51,-1740.33
  Top Layer w15: R3.1@244.51,-1740.33 262.6,-1758.42 R3.1
NetJP1_2: JP1.2 U1.3 | length 3206.7
  Bottom Layer w8: JP1.2 603.94,-187.4 646.47,-144.87 646.47,-69.78 683,-33.25 1665.25,-33.25 1687.5,-55.5 1687.5,-290.5 1749,-352 1907,-352 1980,-425 1980,-1161.25 1941,-1200.25 1640.25,-1200.25 1625,-1185 1625,-976 1605.1,-956.1 U1.3
NetP20_5: P20.5 U3.9 | length 331.8
  Bottom Layer w8: P20.5 900.86,-1849.14 900.86,-1813.16 1060.49,-1653.53 1126,-1653.53 U3.9
NetP20_6: P20.6 U3.5 | length 1136.2
  Top Layer w8: P20.6 800,-1900 825,-1925 1462,-1925 1514,-1873 v1(1514,-1625)
  Bottom Layer w8: U3.5 v1@1514,-1625.59
NetP20_7: P20.7 U3.12 | length 1003
  Bottom Layer w8: P20.7 650,-1900 550,-1900 525,-1875 525,-1760 709.75,-1575.25 1083.84,-1575.25 1083,-1574.41 U3.12
NetP20_8: P20.8 U3.10 | length 681.5
  Bottom Layer w8: P20.8 600,-1747.25 687.25,-1660 1030,-1660 1064.41,-1625.59 U3.10
NetR2_1: R2.1 U1.40 | length 1224.9
  Top Layer w8: v1(1339,-925.25) 1339,-968.25 1573,-1202.25 1573,-1311 1531.75,-1352.25 1417.75,-1352.25 1406,-1364 1406,-1408 1418,-1420 R2.1
  Bottom Layer w8: U1.40 1325.79,-912.04 v1(1339,-925.25)
NetR3_2: R3.2 U1.34 | length 1976.4
  Top Layer w8: R3.2 924,-1760 940,-1776 940,-1893 953,-1906 1136,-1906 1153.53,-1888.47 1153.53,-1730.53 1130,-1707 1132,-1705 v1(1132,-978) v1@1131.1,-977.1
  Bottom Layer w8: v1(1132,-978) 1132,-973 1134,-971 1134,-956.1 U1.34
NetR4_2: R4.2 U1.33 | length 2038.2
  Top Layer w8: R4.2 372,-1680 435.25,-1743.25 943.25,-1743.25 960,-1760 960,-1873 978.25,-1891.25 1120.53,-1891.25 1139.53,-1872.25 1139.53,-1755.53 1104,-1720 v1(1104,-1185)
  Bottom Layer w8: v1(1104,-1185) 1126,-1163 1242,-1163 1252,-1153 1252,-984.25 1243.54,-975.79 U1.33
NetR5_2: R5.2 U1.24 U2.2 | length 1832.3
  Top Layer w8: v1(619,-1204) 619,-707.25 615,-703.25 656,-662.25 v1(656,-660) ; v1(801,-564) 801,-572.33 801.33,-572.67 801.33,-433.67 v1(802,-433) v1@801.33,-432.33
  Bottom Layer w8: v1(619,-1204) 620,-1203 905.75,-1203 979,-1276.25 1121,-1276.25 1210,-1187.25 1266.73,-1187.25 U1.24 ; v1(656,-660) 659.06,-660 v1@659.31,-660.25 ; U2.2 760.63,-722.63 751,-713 721.95,-683.95 683.01,-683.95 v1@659.31,-660.25 ; v1(801,-564) 796.4,-564 788.07,-572.33 787.81,-572.33 737.45,-622.7 699.89,-660.25 v1@659.31,-660.25 ; v1(802,-433) 802,-380.6 R5.2
NetR7_1: R7.1 U1.32 U2.14 | length 474.8
  Top Layer w8: v4(1059,-974) 1080,-953 1157.31,-953 1162,-957.69 v4(1162,-997)
  Bottom Layer w8: U2.14 1039.06,-919.06 1060,-940 R7.1@1060,-1040 ; v4(1162,-997) 1163.53,-995.47 U1.32
NetR9_1: R9.1 U2.27 | length 118.6
  Bottom Layer w10: R9.1@620,-777.4 622.13,-779.54 622.13,-812.13 630.63,-820.63 U2.27
NetR10_1: R10.1 U2.23 | length 121.4
  Bottom Layer w10: R10.1@620,-942.6 620,-905.23 625.86,-899.37 U2.23
NetU1_7: U1.7 U3.2 | length 677.5
  Bottom Layer w8: U3.2 1499,-1548.82 1591,-1456.82 1591,-1045 1580.84,-1034.84 U1.7
NetU1_10: U1.10 U3.8 | length 926.6
  Top Layer w8: v1(1432,-1326.25) v1(1508,-1326.25)
  Bottom Layer w8: U3.8 1195,-1676.77 1245,-1626.77 1245,-1402.25 1321,-1326.25 v1(1432,-1326.25) ; v1(1508,-1326.25) 1508,-1158.25 1498,-1148.25 1498,-1102.9 1507,-1093.9 U1.10
NetU1_11: U1.11 U2.19 | length 2143.7
  Top Layer w8: v1(980.5,-1170.75) 1012,-1139.25 1012,-961.69 1044.69,-929 1189.75,-929 1247,-986.25 1247,-1488 1324.25,-1565.25 1475.75,-1565.25 1501,-1540 v1(1501,-1505.25)
  Bottom Layer w8: U2.19 780.32,-1071.32 880.25,-1171.25 980,-1171.25 v1(980.5,-1170.75) ; v1(1501,-1505.25) 1501,-1375.25 1576,-1300.25 1576,-1113.58 U1.11
NetU1_12: U1.12 U2.16 | length 1670.4
  Top Layer w8: v1(977,-983.25) 977,-919.69 982.69,-914 1211,-914 1278,-981 1278,-1467 1338,-1527 1375,-1527 1382,-1520 1382,-1317 1463,-1236 1535.25,-1236 v1(1537,-1234.25)
  Bottom Layer w8: U2.16 839.37,-977.62 851.75,-990 966.46,-990 973.21,-983.25 v1(977,-983.25) ; v1(1537,-1234.25) U1.12
NetU1_14: U1.14 U3.6 | length 736.4
  Bottom Layer w8: U3.6 1419.84,-1653 1292.69,-1653 1288,-1648.31 1288,-1400.25 1338,-1350.25 1450.75,-1350.25 1463.58,-1337.42 U1.14
NetU1_15: U1.15 U3.11 | length 652.3
  Bottom Layer w8: U3.11 1190,-1600 1220,-1570 1220,-1374.25 1289,-1305.25 1412.75,-1305.25 1443.9,-1274.1 U1.15
NetU1_16: U1.16 U3.13 | length 614.6
  Bottom Layer w8: U3.13 1195.31,-1548.82 1200,-1544.13 1200,-1335 1250,-1285 1405.31,-1285 1410,-1280.31 1424.21,-1266.1 U1.16
NetU1_23: U1.23 U3.4 | length 670.6
  Top Layer w8: v1(1216,-1233.25) 1216,-1567 1249,-1600 v1(1329,-1600)
  Bottom Layer w8: v1(1216,-1233.25) 1286.42,-1233.25 U1.23 ; v1(1329,-1600) 1419.65,-1600 1420.65,-1599 U3.4
NetU1_25: U1.25 U2.9 | length 641.8
  Top Layer w8: v1(974,-1087.25) 953,-1066.25 953,-862 981,-834 v1(981,-811)
  Bottom Layer w8: U2.9 971.37,-820.63 v1(981,-811) ; v1(974,-1087.25) 974,-1088.25 986,-1100.25 1083.25,-1100.25 1116.27,-1133.27 U1.25
NetU1_27: U1.27 U2.10 | length 1004.9
  Top Layer w8: v1(1028,-785.25) 971,-785.25 912,-844.25 912,-1051.25 950,-1089.25 950,-1178 981,-1209 1017.25,-1209 1106,-1120.25 v1(1106,-1090)
  Bottom Layer w8: U2.10 926.94,-840.31 932,-835.25 1009,-835.25 1028,-816.25 v1(1028,-785.25) ; v1(1106,-1090) 1108,-1090 1111.9,-1093.9 U1.27
NetU1_28: U1.28 U2.7 | length 1445.5
  Top Layer w8: v1(974,-721.25) 1077,-721.25 1109,-689.25 1109,-497.25 1127,-479.25 1173,-479.25 1190,-496.25 1190,-854.31 1185.31,-859 1051.41,-859 v1(1020.17,-890.25)
  Bottom Layer w8: U2.7 859.06,-735.83 873.63,-721.25 v1(974,-721.25) ; v1@1021,-888 1020.17,-888.83 v1(1020.17,-890.25) 1034.25,-890.25 1081,-937 1081,-1020 1135.21,-1074.21 U1.28
NetU1_29: U1.29 U2.12 | length 444
  Bottom Layer w8: U2.12 966.57,-879.68 980.75,-865.5 1039.5,-865.5 1095,-921 1095,-998.25 1151.28,-1054.53 U1.29
NetU1_30: U1.30 U2.11 | length 439.6
  Bottom Layer w8: U2.11 958.25,-860 969,-849.25 1045.25,-849.25 1109,-913 1109,-987.53 1156.32,-1034.84 U1.30
pads on no net: J21.1 J21.2 J22.7 J22.8 J23.6 J23.7 J23.8 J24.1 J24.4 J24.None P20.2 S1.2 S1.3 U1.8 U1.9 U1.13 U1.19 U1.20 U1.21 U1.22 U1.26 U1.31 U1.37 U1.38 U1.39 U1.41 U1.48 U2.25

## Keep-outs
Keep-Out Layer:
  the board outline again, w10

## Other copper
Top Layer:
  region net NetC10_2: 680,-970 680,-750 640,-750 640,-970
  rectangle net NetC10_2: 623,-630 720,-590
  rectangle net NetC10_2: 675,-1326 720,-590
  rectangle net GND: 750,-1475 860,-590
Bottom Layer:
  region net NetC10_2: 719,-627 719,-587 99,-587 99,-627
  region net NetC10_2: 676,-1320 676,-1280 101,-1280 101,-1320
  rectangle net GND: 325,-1175 365,-725
  rectangle net NetC10_2: 100,-1300 140,-625
Multi-Layer:
  circle w0.5: c1850,-150 r48
  circle w0.5: c1850,-150 r48
  circle w0.5: c150,-150 r48
  circle w0.5: c150,-150 r48

## Silkscreen, mask and mechanical layers (free items; w line width, h text height)
Top Overlay:
  text "P/N 17.11.PP004" at 1625,-1900 h35 r90
  text "Lafleur Designs" at 200,-1920 h35
  text "UCSD PANOSETI" at 200,-1975 h35
  text "Shutter Controller" at 675,-1975 h35
  text "Rev 3c," at 1300,-1975 h35
  text "Aug-2020" at 1550,-1975 h35
Bottom Overlay:
  text "+" at 35,-960 h60
  text "+" at 19,-1361 h60
Mechanical 20:
  circle w0.5: c1924.61,-1018.31 r13.78
  circle w0.5: c1874.61,-868.31 r13.78
  circle w0.5: c1874.61,-918.31 r13.78
  circle w0.5: c1874.61,-968.31 r13.78
  circle w0.5: c1924.61,-968.31 r13.78
  circle w0.5: c1924.61,-918.31 r13.78
  circle w0.5: c1924.61,-868.31 r13.78
  circle w0.5: c1924.61,-818.31 r13.78
  circle w0.5: c1874.61,-1018.31 r13.78
  circle w0.5: c1874.61,-818.31 r13.78
  circle w0.5: c520.08,-708.66 r21.46
  circle w0.5: c520.08,-808.66 r21.46
  circle w0.5: c520.08,-908.66 r21.46
  circle w0.5: c520.08,-1008.66 r21.46
  circle w0.5: c520.08,-1108.66 r21.46
  circle w0.5: c520.08,-1208.66 r21.46
  circle w0.5: c650,-520.08 r21.46
  circle w0.5: c750,-520.08 r21.46
  circle w0.5: c850,-520.08 r21.46
  circle w0.5: c950,-520.08 r21.46
  circle w0.5: c1050,-520.08 r21.46
  circle w0.5: c1150,-520.08 r21.46
  circle w0.5: c1250,-520.08 r21.46
  circle w0.5: c1350,-520.08 r21.46
  circle w0.5: c150,-150 r48
  circle w0.5: c1850,-150 r48
  circle w0.5: c700,-1850 r17.72
  circle w0.5: c800,-1850 r17.72
  circle w0.5: c900,-1850 r17.72
  circle w0.5: c1000,-1850 r17.72
  circle w0.5: c1100,-1850 r17.72
  circle w0.5: c1200,-1850 r17.72
  circle w0.5: c1300,-1850 r17.72
  circle w0.5: c1400,-1850 r17.72
  circle w0.5: c1850,-150 r90
  circle w0.5: c150,-150 r90
  lines w0.5: 0,-2000 0,0 2000,0 2000,-2000 0,-2000 ; 39.37,-1897.64 cw(c39.37,-1881.89) 39.37,-1866.14 59.06,-1866.14 cw(c59.06,-1881.89) 59.06,-1897.64 39.37,-1897.64 ; 39.37,-1574.8 cw(c39.37,-1559.06) 39.37,-1543.31 59.06,-1543.31 cw(c59.06,-1559.06) 59.06,-1574.8 39.37,-1574.8 ; 147.64,-1830.71 ccw(c163.39,-1830.71) 179.13,-1830.71 179.13,-1807.09 ccw(c163.39,-1807.09) 147.64,-1807.09 147.64,-1830.71 ; 147.64,-1633.86 ccw(c163.39,-1633.86) 179.13,-1633.86 179.13,-1610.24 ccw(c163.39,-1610.24) 147.64,-1610.24 147.64,-1633.86
Mechanical 21:
  circle w0.5: c150,-150 r48
  circle w0.5: c1850,-150 r48
  circle w0.5: c600,-1850 r17.72
  circle w0.5: c700,-1850 r17.72
  circle w0.5: c800,-1850 r17.72
  circle w0.5: c900,-1850 r17.72
  circle w0.5: c1000,-1850 r17.72
  circle w0.5: c1100,-1850 r17.72
  circle w0.5: c1200,-1850 r17.72
  circle w0.5: c1300,-1850 r17.72
  circle w0.5: c1850,-150 r90
  circle w0.5: c150,-150 r90
  lines w0.5: 0,-2000 0,0 2000,0 2000,-2000 0,-2000
Mechanical 22:
  circle w0.5: c1924.61,-1018.31 r13.78
  circle w0.5: c1874.61,-868.31 r13.78
  circle w0.5: c1874.61,-918.31 r13.78
  circle w0.5: c1874.61,-968.31 r13.78
  circle w0.5: c1924.61,-968.31 r13.78
  circle w0.5: c1924.61,-918.31 r13.78
  circle w0.5: c1924.61,-868.31 r13.78
  circle w0.5: c1924.61,-818.31 r13.78
  circle w0.5: c1874.61,-1018.31 r13.78
  circle w0.5: c1874.61,-818.31 r13.78
  circle w0.5: c520.08,-708.66 r21.46
  circle w0.5: c520.08,-808.66 r21.46
  circle w0.5: c520.08,-908.66 r21.46
  circle w0.5: c520.08,-1008.66 r21.46
  circle w0.5: c520.08,-1108.66 r21.46
  circle w0.5: c520.08,-1208.66 r21.46
  circle w0.5: c650,-520.08 r21.46
  circle w0.5: c750,-520.08 r21.46
  circle w0.5: c850,-520.08 r21.46
  circle w0.5: c950,-520.08 r21.46
  circle w0.5: c1050,-520.08 r21.46
  circle w0.5: c1150,-520.08 r21.46
  circle w0.5: c1250,-520.08 r21.46
  circle w0.5: c1350,-520.08 r21.46
  circle w0.5: c150,-150 r48
  circle w0.5: c1850,-150 r48
  circle w0.5: c600,-1850 r17.72
  circle w0.5: c700,-1850 r17.72
  circle w0.5: c800,-1850 r17.72
  circle w0.5: c900,-1850 r17.72
  circle w0.5: c1000,-1850 r17.72
  circle w0.5: c1100,-1850 r17.72
  circle w0.5: c1200,-1850 r17.72
  circle w0.5: c1300,-1850 r17.72
  circle w0.5: c1850,-150 r90
  circle w0.5: c150,-150 r90
  lines w0.5: 0,-2000 0,0 2000,0 2000,-2000 0,-2000 ; 39.37,-1897.64 cw(c39.37,-1881.89) 39.37,-1866.14 59.06,-1866.14 cw(c59.06,-1881.89) 59.06,-1897.64 39.37,-1897.64 ; 39.37,-1574.8 cw(c39.37,-1559.06) 39.37,-1543.31 59.06,-1543.31 cw(c59.06,-1559.06) 59.06,-1574.8 39.37,-1574.8 ; 147.64,-1830.71 ccw(c163.39,-1830.71) 179.13,-1830.71 179.13,-1807.09 ccw(c163.39,-1807.09) 147.64,-1807.09 147.64,-1830.71 ; 147.64,-1633.86 ccw(c163.39,-1633.86) 179.13,-1633.86 179.13,-1610.24 ccw(c163.39,-1610.24) 147.64,-1610.24 147.64,-1633.86
Mechanical 23:
  circle w0.5: c150,-150 r48
  circle w0.5: c1850,-150 r48
  circle w0.5: c600,-1850 r17.72
  circle w0.5: c700,-1850 r17.72
  circle w0.5: c800,-1850 r17.72
  circle w0.5: c900,-1850 r17.72
  circle w0.5: c1000,-1850 r17.72
  circle w0.5: c1100,-1850 r17.72
  circle w0.5: c1200,-1850 r17.72
  circle w0.5: c1300,-1850 r17.72
  circle w0.5: c1850,-150 r90
  circle w0.5: c150,-150 r90
  lines w0.5: 0,-2000 0,0 2000,0 2000,-2000 0,-2000
Mechanical 24:
  circle w0.5: c150,-150 r48
  circle w0.5: c1850,-150 r48
  lines w0.5: 0,-2000 0,0 2000,0 2000,-2000 0,-2000
  lines w10: 0,-2000 2000,-2000 2000,0 0,0 0,-2000
Mechanical 25:
  lines w0.5: 0,-2000 2000,-2000 2000,0 0,0 0,-2000
Mechanical 26:
  lines w0.5: 0,-2000 0,0 2000,0 2000,-2000 0,-2000

## Text inside footprints (layer, text, board x,y; h text height)
U1: Mechanical 7 "Default Horiz Padstyle: RX11Y58D0T" at 1800,-1452 h50; Mechanical 7 "Default Vert Padstyle: RX11Y58D0T" at 1787.5,-1512 h50; Mechanical 7 "Heat Tab Padstyle: RX138Y138D0T" at 1762.5,-1572 h50; Mechanical 7 "Alt 1 Padstyle: OX60Y90D30P" at 1712.5,-1692 h50; Mechanical 7 "Alt 2 Padstyle: OX90Y60D30P" at 1712.5,-1752 h50; Mechanical 7 "1.968504E-02in/0.5mm" at 1078,-939.07 h25; Mechanical 7 "0.03in/0.762mm" at 1300.5,-728 h25; Mechanical 7 "0.354in/8.992mm" at 1468.75,-653 h25; Mechanical 7 "0.354in/8.992mm" at 1003,-1037.5 h25; Bottom Overlay "*" at 1603.5,-916.89 h50; Mechanical 13 "*" at 1603.5,-916.89 h50